# Altium PCB DigitalInclinometer.PcbDoc
Units mm, origin at the board's own origin, x right, y up, seen from the top; angles counter-clockwise.
Board outline 76.2 x 76.2 mm, 2 copper layers (Top Layer, Bottom Layer); 27 components, 28 nets, 125 pads, 16 vias.
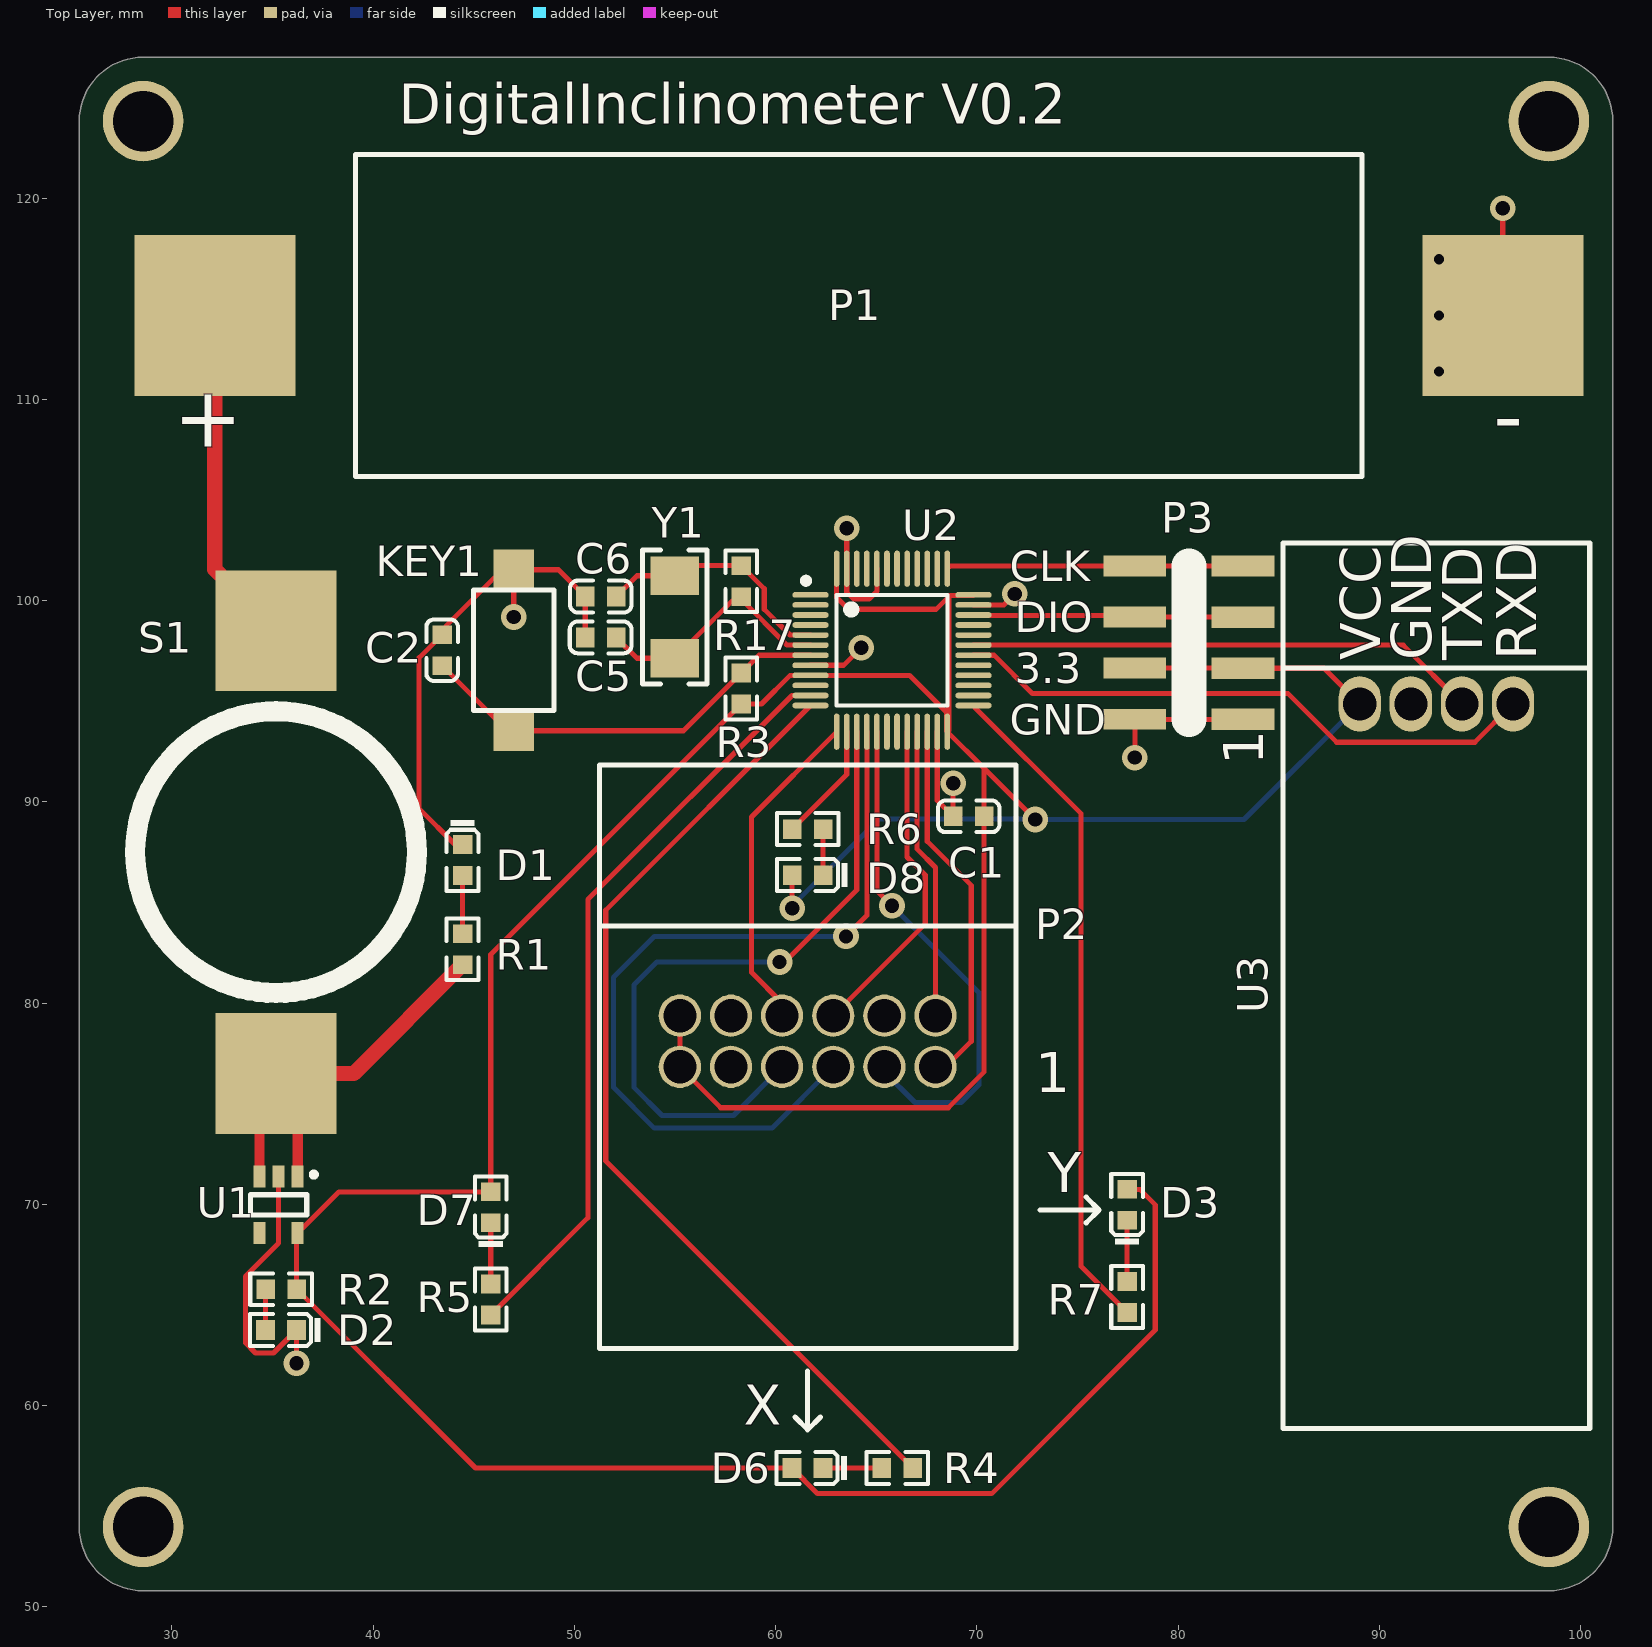
[diagram p0: Top Layer view]
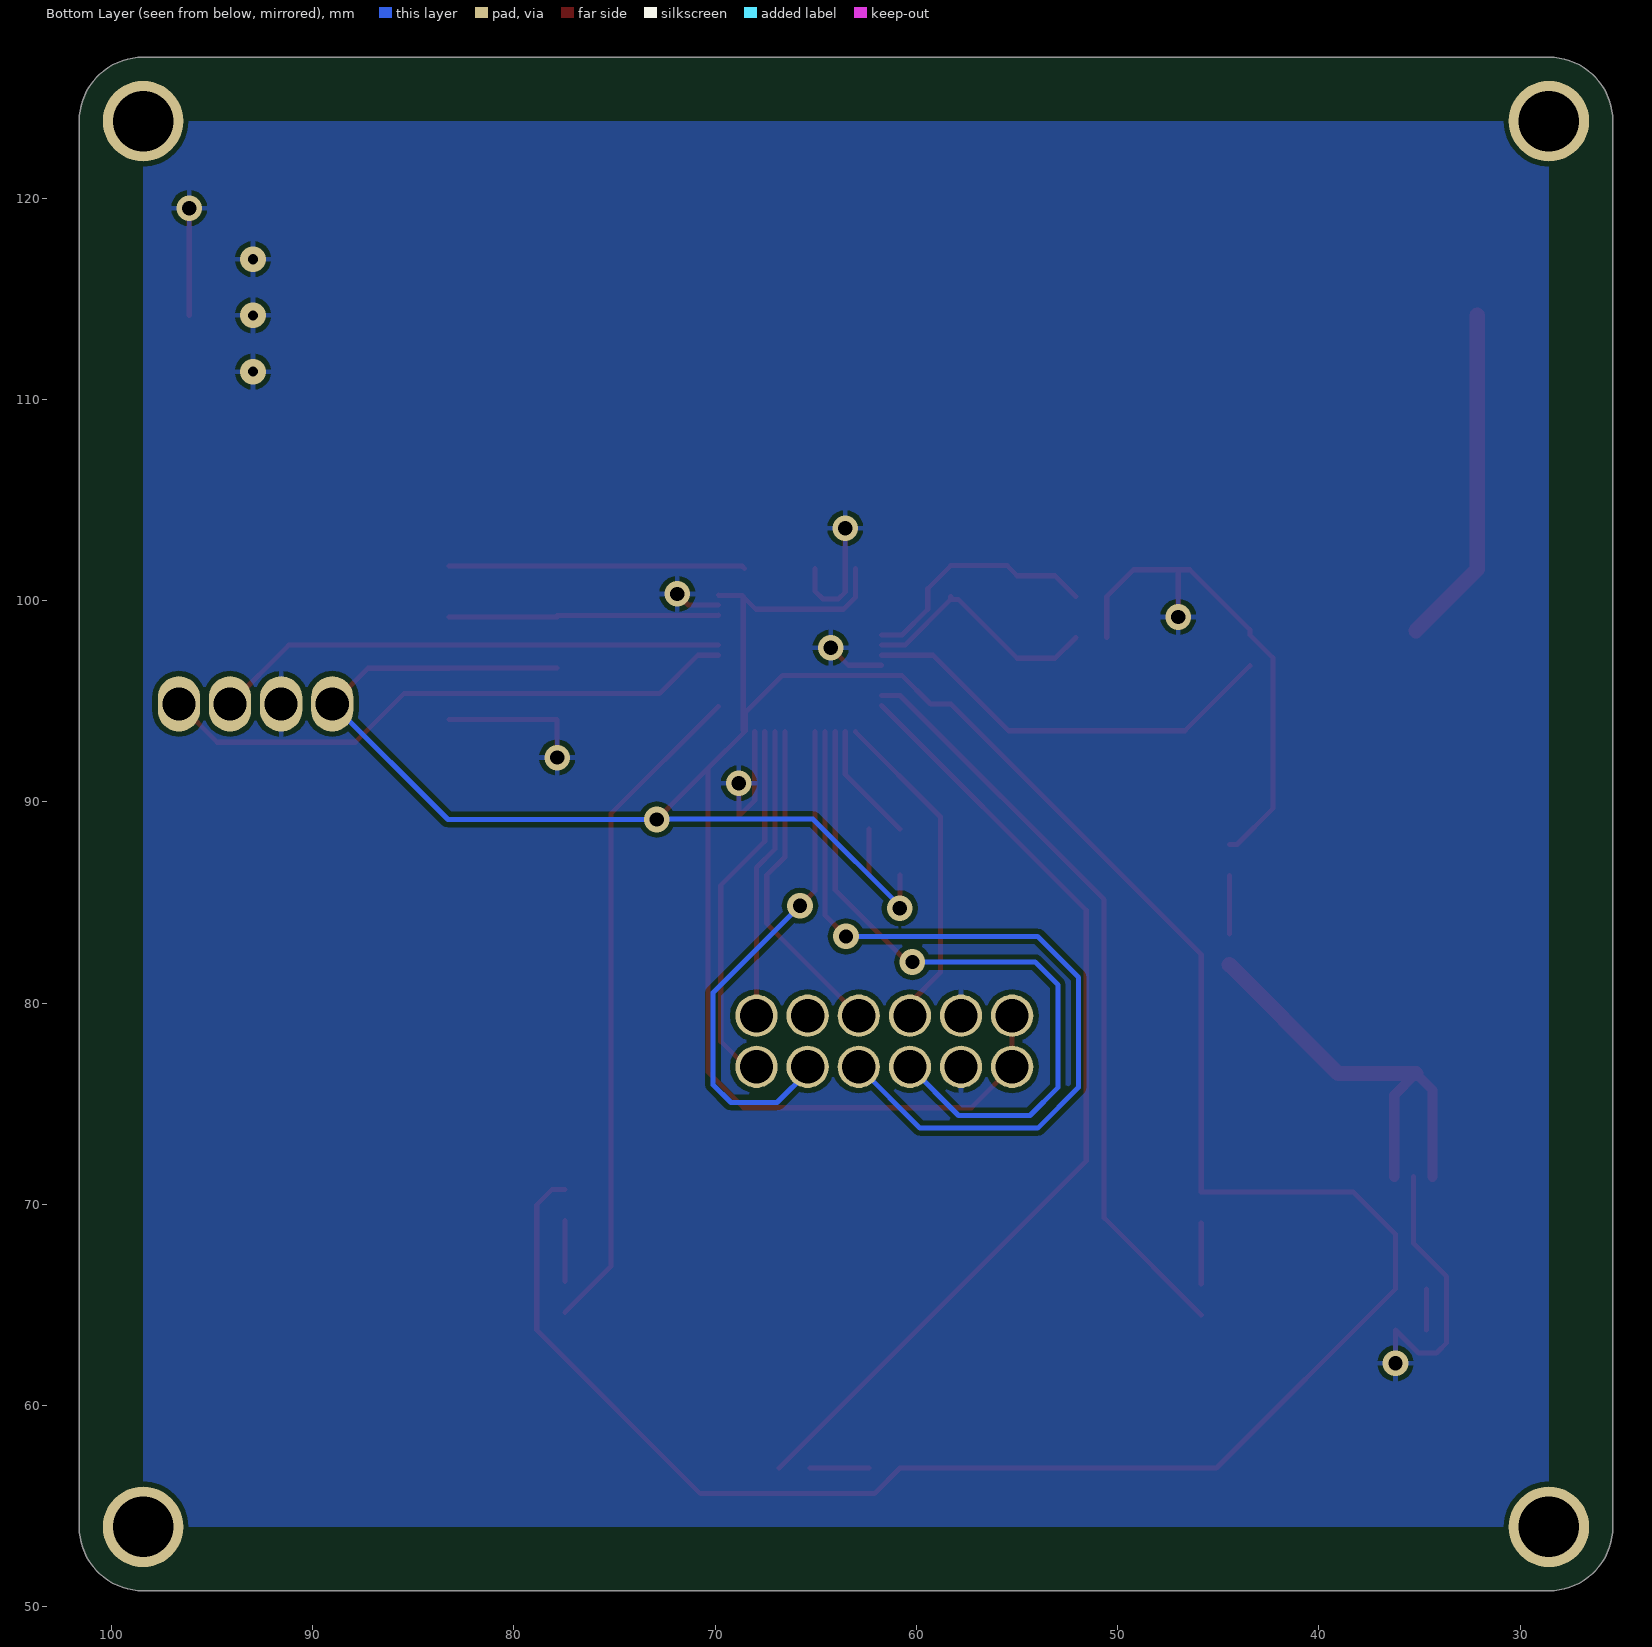
[diagram p1: Bottom Layer view, seen from below]
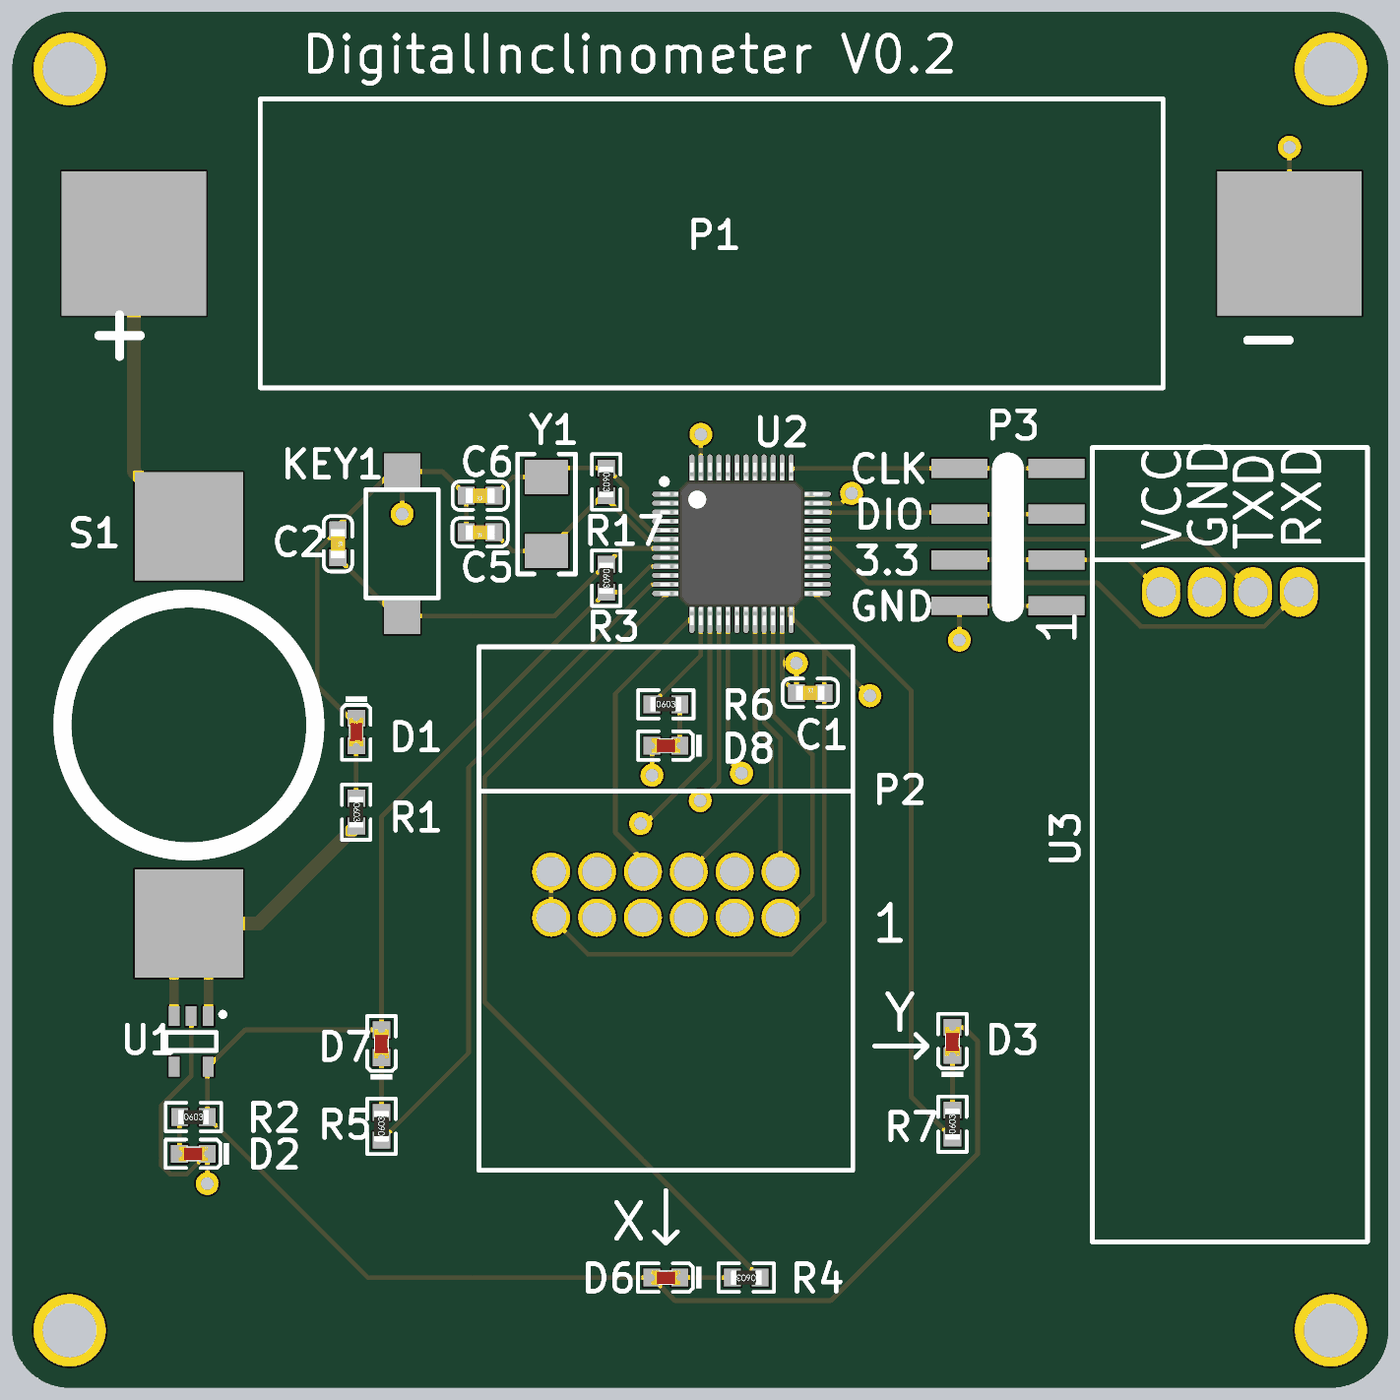
[diagram p2: 3D render of the assembled board from above, using the file's embedded part models]

## Layer stack, top to bottom
Top Solder: solder mask 0.0102, Solder Resist, Dk 3.5
Top Layer: signal copper 0.0356
Dielectric 1: dielectric 0.32, FR-4, Dk 4.8
Bottom Layer: signal copper 0.0356
Bottom Solder: solder mask 0.0102, Solder Resist, Dk 3.5

## Board outline
25.4,53.975 25.4,123.825 cw(c28.575,123.825) 28.575,127 98.425,127 cw(c98.425,123.825) 101.6,123.825 101.6,53.975 cw(c98.425,53.975) 98.425,50.8 28.575,50.8 cw(c28.575,53.975)

## Design rules (kind name [scope] priority, off if disabled: settings)
Clearance [All] p1: gap=0.254 ignorepadtopadclearanceinfootprint=FALSE except(0: Arc-Hole Track-Hole SMDPad-Hole THPad-Hole Via-Hole Fill-Hole Poly-Hole Region-Hole Text-Hole; 0.203: Arc-Arc Arc-Track Arc-SMDPad Track-Track Track-SMDPad SMDPad-SMDPad)
ComponentClearance ComponentClearance_3 [InComponent('U3')] p1: gap=-20 collisioncheckmode=3 verticalgap=2540 showdistances=FALSE
ComponentClearance ComponentClearance_2 [InComponent('S1')] p2: gap=-0.508 collisioncheckmode=3 verticalgap=2540 showdistances=FALSE
ComponentClearance ComponentClearance_1 [InComponent('P2')] p3: gap=-0.508 collisioncheckmode=3 verticalgap=2540 showdistances=TRUE
ComponentClearance [All] p4: gap=0.254 collisioncheckmode=3 verticalgap=0.254 showdistances=FALSE
PolygonConnect [All] p1: connectstyle=Relief reliefconductorwidth=0.254 reliefentries=4 polygonreliefangle="90 Angle" airgapwidth=0.254
RoutingVias [All] p1: holewidth=0.711 width=1.27 viastyle="Through Hole" minholewidth=0.711 minwidth=1.27 maxholewidth=0.711 maxwidth=1.27
SolderMaskExpansion [All] p1: expansion=0.102
Width [All] p1: maxlimit=0.762 minlimit=0.254 preferedwidth=0.254
29 further rules are at their usual default settings.

## Components (designator, comment, footprint, x,y, rotation, side; value= is the part's Value field where it differs from the comment)
C1 "100nF (104) 10% 50V" 0603_C 69.596,89.281 r0 top
C2 "100nF (104) 10% 50V" 0603_C 43.434,97.536 r270 top
C5 "20pF (200) 5% 50V" 0603_C 51.308,98.171 r180 top
C6 "20pF (200) 5% 50V" 0603_C 51.316,100.203 r180 top
D1 "红灯 0603" 0603_LED_S1 44.45,87.114 r270 top
D2 "黄灯 0603" 0603_LED_S1 35.425,63.754 r180 top
D3 "绿灯 0603" 0603_LED_S1 77.47,69.977 r90 top
D6 "绿灯 0603" 0603_LED_S1 61.587,56.896 r180 top
D7 "绿灯 0603" 0603_LED_S1 45.847,69.85 r90 top
D8 "绿灯 0603" 0603_LED_S1 61.595,86.36 r180 top
KEY1 "KEY_M" RESET-KEY-SMD 46.99,97.536 r90 top
P1 "BatteryBox" 14500LIBATTERYBOX 64.135,114.173 r180 top
P2 "EVAL-ADXL355-PMDZ模块" ADXL355MODULE 67.945,76.835 r0 top
P3 "SWD Interface" 2.54mmHeader2x4-SMD 80.541,94.1 r90 top
R1 "10KΩ (1002) ±1%" 0603_R 44.45,82.677 r270 top
R2 "10KΩ (1002) ±1%" 0603_R 35.433,65.786 r0 top
R3 "10KΩ (1002) ±1%" 0603_R 58.293,95.631 r270 top
R4 "10KΩ (1002) ±1%" 0603_R 66.048,56.896 r180 top
R5 "10KΩ (1002) ±1%" 0603_R 45.847,65.278 r90 top
R6 "10KΩ (1002) ±1%" 0603_R 61.595,88.646 r0 top
R7 "10KΩ (1002) ±1%" 0603_R 77.47,65.397 r90 top
R17 "1MΩ (1004) ±1%" 0603_R 58.293,100.965 r270 top
S1 "SW-SPST" PowerSwitcher 35.179,87.503 r270 top
U1 "SPX3819M5-L-3-3" SOT-23-5 35.306,69.977 r90 top
U2 "STM32F103C8T6" LQFP-48_7x7x05P 65.786,97.536 r270 top
U3 "BLE-HC-06" BLE-HC06-SMD 89.027,94.869 r0 top
Y1 "8MHz ±20ppm 20pF" SMD-5032_2P 54.991,99.187 r90 top

## Footprints (in the part's own frame and the unit in brackets; to place one, negate y for a bottom-side part, rotate by r counter-clockwise, add the part's x,y. Pads: shape width x height; smd on the part's side, far side on the other; paste and mask are expansions set on the pad)
2.54mmHeader2x4-SMD [mm]
  rect 1.06x3.12 smd: 1(0,-2.69) 3(2.54,-2.69) 4(2.553,2.69) 5(5.08,-2.69) 6(5.087,2.69) 7(7.62,-2.69) 8(7.62,2.69)
  rect 1.02x3.12 smd: 2(0,2.69)
  silkscreen extent 0,0 7.62,0
0603_C [mm]
  rect 0.93x0.98 smd: 1(-0.77,0) 2(0.77,0)
  silkscreen extent -1.53,-0.79 1.54,0.79, body extent -0.8,-0.4 0.8,0.4, height 0.3
0603_LED_S1 [mm]
  rect 0.93x0.98 smd: A(0.77,0) K(-0.77,0)
  silkscreen extent -1.98,-0.79 1.54,0.79, body extent -0.8,-0.4 0.8,0.4, height 0.6
0603_R [mm]
  rect 0.93x0.98 smd: 1(-0.77,0) 2(0.77,0)
  silkscreen extent -1.53,-0.79 1.54,0.79, body extent -0.85,-0.4 0.85,0.4, height 0.56
14500LIBATTERYBOX [mm]
  rect 8x8 smd: 1(-32,0) 2(32,0)
  silkscreen extent -25,-8 25,8
ADXL355MODULE [mm]
  round 2.1 hole 1.65: 1(0,0) 2(-2.54,0) 3(-5.08,0) 4(-7.62,0) 5(-10.16,0) 6(-12.7,0) 7(0,2.54) 8(-2.54,2.54) 9(-5.08,2.54) 10(-7.62,2.54) 11(-10.16,2.54) 12(-12.7,2.54)
  silkscreen extent -16.7,-18.03 8.13,15
BLE-HC06-SMD [mm]
  oval 2.1x2.75 hole 1.65: 1(0,0) 2(2.54,0) 3(5.08,0) 4(7.62,0)
  silkscreen extent -3.81,-36 11.43,8
LQFP-48_7x7x05P [mm]
  oval 0.28x1.8 smd mask+0.051: 1(-2.75,-4.05) 2(-2.25,-4.05) 3(-1.75,-4.05) 4(-1.25,-4.05) 5(-0.75,-4.05) 6(-0.25,-4.05) 7(0.25,-4.05) 8(0.75,-4.05) 9(1.25,-4.05) 10(1.75,-4.05) 11(2.25,-4.05) 12(2.75,-4.05) 25(2.75,4.05) 26(2.25,4.05) 27(1.75,4.05) 28(1.25,4.05) 29(0.75,4.05) 30(0.25,4.05) 31(-0.25,4.05) 32(-0.75,4.05) 33(-1.25,4.05) 34(-1.75,4.05) 35(-2.25,4.05) 36(-2.75,4.05)
  oval 1.8x0.28 smd mask+0.051: 13(4.05,-2.75) 14(4.05,-2.25) 15(4.05,-1.75) 16(4.05,-1.25) 17(4.05,-0.75) 18(4.05,-0.25) 19(4.05,0.25) 20(4.05,0.75) 21(4.05,1.25) 22(4.05,1.75) 23(4.05,2.25) 24(4.05,2.75) 37(-4.05,2.75) 38(-4.05,2.25) 39(-4.05,1.75) 40(-4.05,1.25) 41(-4.05,0.75) 42(-4.05,0.25) 43(-4.05,-0.25) 44(-4.05,-0.75) 45(-4.05,-1.25) 46(-4.05,-1.75) 47(-4.05,-2.25) 48(-4.05,-2.75)
  silkscreen extent -3.6,-4.42 2.75,2.75, body extent -4.5,-4.5 4.5,4.5, height 1.6
PowerSwitcher [mm]
  rect 6x6 smd: 1(-11,0) 2(11,0)
  silkscreen extent -7,-7 7,7
RESET-KEY-SMD [mm]
  rect 2x2 smd: 1(-4,0) 2(4,0)
  silkscreen extent -3,-2 3,2
SMD-5032_2P [mm]
  rect 1.9x2.4 smd: 1(-2.05,0) 2(2.05,0)
  silkscreen extent -3.32,-1.6 3.32,1.6
SOT-23-5 [mm]
  rect 1.1x0.6 smd: 1(1.4,-0.95) 2(1.4,0) 3(1.4,0.95) 4(-1.4,0.95) 5(-1.4,-0.95)
  silkscreen extent -0.5,-1.88 1.62,1.4

## Part data
C1 C2: library part "0603 100nF (104) 10% 50V", "贴片电容", Package=0603, SuppliersPartNumber=C14663, ComponentLink1Description=供应, ComponentLink1URL=http://www.szlcsc.com/product/details_15331.html, Supplier=LC
C5 C6: library part "0603 20pF (200) 5% 50V", "贴片电容", Package=0603, SuppliersPartNumber=C1648, ComponentLink1Description=供应, ComponentLink1URL=http://www.szlcsc.com/product/details_2000.html, Supplier=LC
D1: library part "0603 红灯", "发光二极管", Package=0603, SuppliersPartNumber=C2286, ComponentLink1Description=供应, ComponentLink1URL=http://www.szlcsc.com/product/details_2659.html, Supplier=LC
D2: library part "0603 黄灯", "发光二极管", Package=0603, SuppliersPartNumber=C72038, ComponentLink1Description=供应, ComponentLink1URL=http://www.szlcsc.com/product/details_73147.html, Supplier=LC
D3 D6 D7 D8: library part "0603 绿灯", "发光二极管", Package=0603, SuppliersPartNumber=C72043, ComponentLink1Description=供应, ComponentLink1URL=http://www.szlcsc.com/product/details_73152.html, Supplier=LC
P1: library part "Header 2", "Header, 2-Pin", LatestRevisionDate=17-Jul-2002, LatestRevisionNote="Re-released for DXP Platform.", Publisher="Altium Limited"
P3: library part "Header 4X2", "Header, 4-Pin, Dual row", LatestRevisionDate=17-Jul-2002, LatestRevisionNote="Re-released for DXP Platform.", Publisher="Altium Limited"
R1 R2 R3 R4 R5 R6 R7: library part "0603 10KΩ (1002) 1%", "贴片电阻", Package=0603, SuppliersPartNumber=C25804, ComponentLink1Description=供应, ComponentLink1URL=http://www.szlcsc.com/product/details_26547.html, Supplier=LC
R17: library part "0603 1MΩ (1004) 1%", "贴片电阻", Package=0603, SuppliersPartNumber=C22935, ComponentLink1Description=供应, ComponentLink1URL=http://www.szlcsc.com/product/details_23662.html, Supplier=LC
S1: "Single-Pole, Single-Throw Switch", LatestRevisionDate=17-Jul-2002, LatestRevisionNote="Re-released for DXP Platform.", PackageDescription="Switch; 2 Leads", PackageReference=SPST-2, Published=24-Mar-1999, Publisher="Altium Limited"
U2: "ARM", Package=LQFP-48_7x7x05P, SuppliersPartNumber=C8734, ComponentLink1Description=供应, ComponentLink1URL=http://www.szlcsc.com/product/details_9243.html, Supplier=LC
Y1: library part "SMD-5032_2P 8MHz 20ppm 20pF", "贴片晶振", Package=SMD-5032_2P, SuppliersPartNumber=C115962, ComponentLink1Description=供应, ComponentLink1URL=http://www.szlcsc.com/product/details_117214.html, Supplier=LC

## Free pads (board coordinates)
  round 4 hole 3: hole1(28.575,123.825) hole2(98.425,123.825) hole3(98.425,53.975) hole4(28.575,53.975)

## Via types
v1: diameter 1.27, hole 0.711, Top Layer to Bottom Layer, 13 vias
v2: diameter 1.27, hole 0.508, Top Layer to Bottom Layer, 3 vias

## Nets (pads, with @x,y where several pads share a name; then routed paths per layer and width w, separated by ;. In a path a pad name is that pad's centre, name@x,y a point inside that pad or via, vN(x,y) a via of type N, cw(c..) or ccw(c..) an arc to the next point about the centre after c; other vN are vias at no path point)
+3.3V: C1.2 D3.A D6.A D7.A D8.A P2.6 P2.12 P3.3 P3.4 R2.2 R3.2 U1.5 U2.9 U2.24 U2.36 U2.48 U3.1 | length 215.4
  Top Layer w0.254: P2.12 P2.6 57.277,74.803 68.58,74.803 70.366,76.589 C1.2 70.366,91.656 ; v1(60.825,84.717) D8.A ; U2.48 63.036,100.159 63.627,99.568 67.98,99.568 68.606,100.193 ; U2.36 69.806,100.256 68.669,100.256 68.606,100.193 ; v1(72.898,89.124) 70.366,91.656 ; D3.A 78.097,70.747 78.867,69.977 78.867,63.754 70.739,55.626 62.087,55.626 D6.A 45.093,56.896 R2.2 36.203,68.524 U1.5 38.299,70.62 D7.A 45.847,82.415 R3.2 59.301,94.861 60.726,96.286 U2.9 66.661,96.286 68.506,94.441 68.506,93.516 U2.24 ; P3.4 83.218,96.654 P3.3 87.256,96.64 U3.1 ; U2.24 68.606,93.556 68.606,100.193 ; U2.24 70.366,91.656
  Bottom Layer w0.254: v1(60.825,84.717) 60.833,84.709 60.833,84.836 65.151,89.154 72.868,89.154 v1(72.898,89.124) 83.282,89.124 U3.1
+3.7V: R1.2 S1.2 U1.1 U1.3 | length 22.5
  Top Layer w0.508: U1.3 34.356,75.68 S1.2 36.256,75.426 U1.1
  Top Layer w0.762: S1.2 39.046,76.503 R1.2
GND: C1.1 C2.1 C5.2 C6.2 D1.K D2.K KEY1.2 P1.1 P2.5 P2.11 P3.1 P3.2 U1.2 U2.8 U2.23 U2.35 U2.44 U2.47 U3.2 | length 69.8
  Top Layer w0.254: U1.2 35.306,68.072 33.655,66.421 33.655,63.119 34.163,62.611 35.052,62.611 D2.K v1(36.195,62.103) ; D1.K 44.069,87.884 42.291,89.662 42.291,97.163 C2.1 43.434,98.552 46.418,101.536 KEY1.2 ; v1(46.99,99.187) KEY1.2 ; C5.2 50.546,98.179 C6.2 49.213,101.536 KEY1.2 ; U2.8 63.385,96.786 v1(64.262,97.663) ; v1(63.536,103.596) U2.47 63.536,100.421 63.881,100.076 64.643,100.076 65.036,100.469 U2.44 ; U2.23 68.036,90.071 C1.1 v1(68.826,90.924) ; U2.35 71.338,99.786 v1(71.882,100.33) ; v1(77.851,92.202) P3.2 P3.1 ; P1.1 v1(96.135,119.503)
  Bottom Layer w0.254: v1(36.195,62.103) v1@36.322,61.976 ; v1@63.5,103.632 v1(63.536,103.596) ; v1(68.826,90.924) v1@68.961,91.059 ; v1(96.135,119.503) v1@96.139,119.507
  other v2: 92.964,111.379 92.964,114.173 92.964,116.967
IMU_DRDY: P2.10 U2.13 | length 16.5
  Top Layer w0.254: P2.10 60.325,80.01 58.801,81.534 58.801,89.251 U2.13
IMU_INT1: P2.7 U2.21 | length 14.5
  Top Layer w0.254: U2.21 67.036,87.65 67.945,86.741 P2.7
IMU_INT2: P2.9 U2.20 | length 16.5
  Top Layer w0.254: P2.9 67.437,83.947 67.437,86.36 66.536,87.261 U2.20
  Bottom Layer w0.254: P2.9 P2.9@62.992,79.375
LED1: R4.1 U2.12 | length 48.4
  Top Layer w0.254: U2.12 51.562,84.612 51.562,72.152 R4.1
LED2: R5.1 U2.11 | length 37.9
  Top Layer w0.254: R5.1 50.673,69.334 50.673,85.148 60.811,95.286 U2.11
LED3: R6.1 U2.14 | length 6
  Top Layer w0.254: R6.1 63.536,91.357 U2.14
LED4: R7.1 U2.25 | length 33.3
  Top Layer w0.254: U2.25@69.85,94.742 75.184,89.408 75.184,66.913 R7.1
NetC2_2: C2.2 KEY1.1 R3.1 U2.7 | length 21.2
  Top Layer w0.254: C2.2 46.664,93.536 KEY1.1 55.428,93.536 R3.1 59.178,97.286 U2.7
NetD1_A: D1.A R1.1 | length 2.9
  Top Layer w0.254: R1.1 D1.A
NetD2_A: D2.A R2.1 | length 2
  Top Layer w0.254: D2.A 34.663,63.762 R2.1
NetD3_K: D3.K R7.2 | length 3
  Top Layer w0.254: R7.2 D3.K
NetD6_K: D6.K R4.2 | length 2.9
  Top Layer w0.254: D6.K R4.2
NetD7_K: D7.K R5.2 | length 3
  Top Layer w0.254: R5.2 D7.K
NetD8_K: D8.K R6.2 | length 2.3
  Top Layer w0.254: D8.K R6.2
NetP1_2: P1.2 S1.1 | length 16.9
  Top Layer w0.762: P1.2 32.135,101.547 S1.1
osc_in: C6.1 R17.1 U2.5 Y1.2 | length 12.3
  Top Layer w0.254: C6.1 53.12,101.237 Y1.2 55.489,101.735 R17.1 59.436,100.592 59.436,99.568 60.718,98.286 U2.5
osc_out: C5.1 R17.2 U2.6 Y1.1 | length 12.4
  Top Layer w0.254: C5.1 53.112,97.137 Y1.1 57.918,100.064 R17.2@58.293,100.064 ; R17.2 R17.2@58.293,100.064 ; U2.6 60.571,97.786 R17.2@58.293,100.064
SPI1_CLK: P2.4 U2.15 | length 34.9
  Top Layer w0.254: v1(60.198,82.042) 60.452,82.042 64.036,85.626 U2.15
  Bottom Layer w0.254: v1(60.198,82.042) 54.102,82.042 52.959,80.899 52.959,75.819 54.356,74.422 57.912,74.422 P2.4
SPI1_MISO: P2.3 U2.16 | length 41.5
  Top Layer w0.254: v1(63.5,83.312) 64.536,84.348 U2.16
  Bottom Layer w0.254: P2.3 59.817,73.787 53.975,73.787 51.943,75.819 51.943,81.28 53.975,83.312 v1(63.5,83.312)
SPI1_MOSI: P2.2 U2.17 | length 25.6
  Top Layer w0.254: U2.17 65.036,85.586 v1(65.786,84.836)
  Bottom Layer w0.254: P2.2 65.405,76.581 66.929,75.057 69.215,75.057 70.104,75.946 70.104,80.518 v1(65.786,84.836)
SPI_CS: P2.1 U2.22 | length 18.6
  Top Layer w0.254: U2.22 67.536,88.039 69.723,85.852 69.723,78.105 68.453,76.835 P2.1
SWCLK: P3.7 P3.8 U2.37 | length 14.8
  Top Layer w0.254: U2.37 68.67,101.72 P3.8 P3.7
SWDIO: P3.5 P3.6 U2.34 | length 13.5
  Top Layer w0.254: U2.34 69.866,99.256 77.851,99.256 P3.6 77.858,99.18 P3.5
USART1_RX: U2.31 U3.3 | length 25.5
  Top Layer w0.254: U2.31 91.19,97.786 U3.3
USART1_TX: U2.30 U3.4 | length 29.4
  Top Layer w0.254: U2.30 70.862,97.286 72.771,95.377 85.471,95.377 87.884,92.964 94.742,92.964 U3.4
pads on no net: P2.8 U1.4 U2.1 U2.2 U2.3 U2.4 U2.10 U2.18 U2.19 U2.26 U2.27 U2.28 U2.29 U2.32 U2.33 U2.38 U2.39 U2.40 U2.41 U2.42 U2.43 U2.45 U2.46

## Polygon pours and split planes (outlines as drawn)
GND on Bottom Layer "Bottom Layer-GND" (solid, pour order 2): 28.575,123.825 98.425,123.825 98.425,53.975 28.575,53.975

## Silkscreen, mask and mechanical layers (free items; w line width, h text height)
Top Overlay:
  text "DigitalInclinometer V0.2" at 41.275,123.698 h2
  text "CLK" at 71.628,100.965 h1.52
  text "DIO" at 71.882,98.425 h1.52
  text "3.3" at 71.882,95.885 h1.52
  text "GND" at 71.628,93.345 h1.52
Mechanical 1:
  the board outline again, w0.254

## Text inside footprints (layer, text, board x,y; h text height)
P1: Top Overlay "+" at 33.528,110.236 h3 r180; Top Overlay "-" at 97.155,109.982 h3 r180
P2: Top Overlay "X" at 58.42,59.055 h2; Top Overlay "1" at 72.898,75.565 h2; Top Overlay "Y" at 73.533,70.612 h2
P3: Top Overlay "1" at 84.224,91.814 h2 r90
U3: Top Overlay "VCC" at 90.043,97.028 h2 r90; Top Overlay "GND" at 92.583,97.028 h2 r90; Top Overlay "TXD" at 95.123,97.028 h2 r90; Top Overlay "RXD" at 97.79,97.028 h2 r90